# Altium PCB RFID_withESP32_PCB.PcbDoc (part 2 of 2)
Units mm, origin at the board's own origin, x right, y up, seen from the top; angles counter-clockwise.
Board outline 186.82 x 50.8 mm, 2 copper layers (Top Layer, Bottom Layer), stack 0.57 mm thick; 77 components, 38 nets, 231 pads, 164 vias.
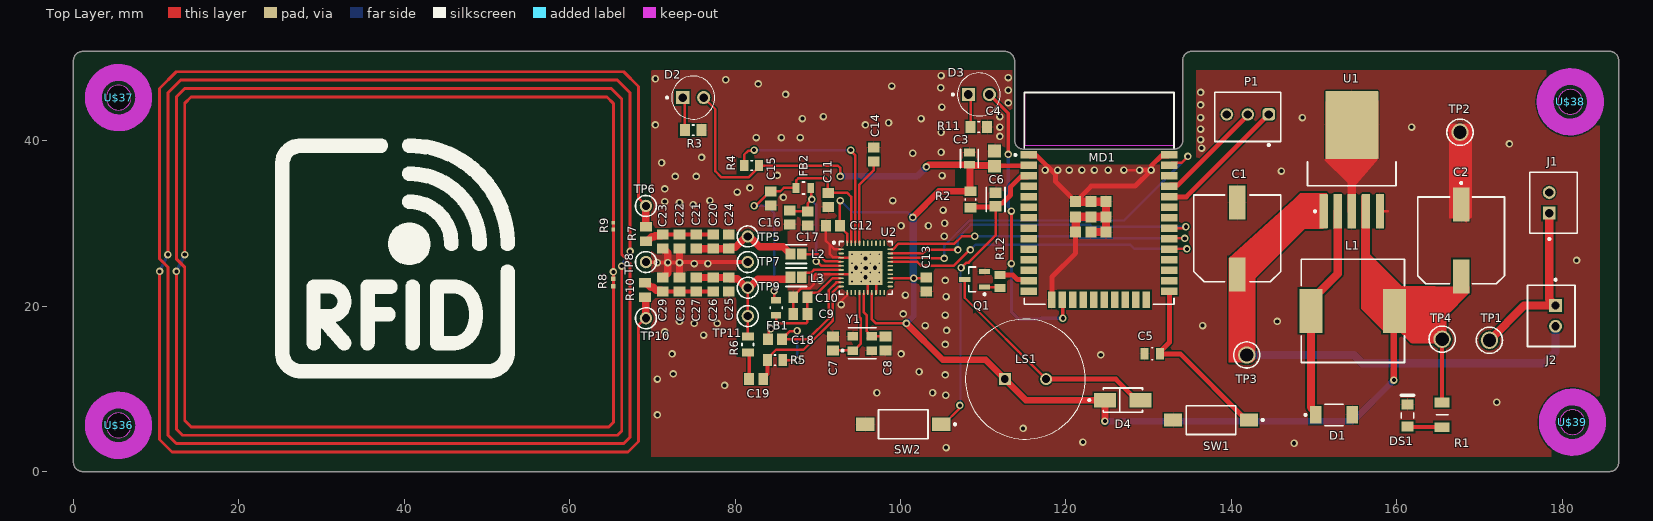
[diagram p0: Top Layer view]

## Via types
v1: diameter 0.907/0.907 (per signal layer), hole 0.5, Top Layer to Bottom Layer, 148 vias
v2: diameter 0.5, hole 0.2, Top Layer to Bottom Layer, 16 vias

## Nets (pads, with @x,y where several pads share a name; then routed paths per layer and width w, separated by ;. In a path a pad name is that pad's centre, name@x,y a point inside that pad or via, vN(x,y) a via of type N, cw(c..) or ccw(c..) an arc to the next point about the centre after c; other vN are vias at no path point) (continued)
NetC14_2: (continued)
  Top Layer w0.3: U2.37@95.04,27.695 95.03,27.705 95.03,34.705 96.774,36.449 C14.2
NetC19_2: C19.2 R6.2 | length 3.3
  Top Layer w0.45: R6.2 81.7,14.23 C19.2
NetC20_1: C20.1 C21.1 C24.2 L2.2 TP5.1 | length 12.9
  Top Layer w0.9: C21.1 C20.1 C24.2 79.39,27.109 80.051,27.109 81.372,28.43 TP5.1 81.696,28.43 82.948,27.178 85.811,27.178 86.472,26.517 86.573,26.517 86.7,26.39 L2.2
NetC20_2: C20.2 C21.2 C22.2 C23.2 R7.1 | length 8.5
  Top Layer w0.45: C23.2 C22.2 C21.2 C20.2
  Top Layer w0.9: R7.1 69.369,27.831 69.904,28.366 70.209,28.366 70.352,28.509 71.101,28.509 C23.2
NetC25_1: C25.1 C26.2 C27.2 L3.2 R6.1 TP9.1 TP11.1 | length 18.4
  Top Layer w0.3: R6.1 TP11.1 TP9.1
  Top Layer w0.9: C27.2 C26.2 C25.1 79.39,23.31 80.286,23.31 81.372,22.224 TP9.1 81.696,22.224 82.713,23.241 86.446,23.241 86.472,23.267 86.573,23.267 86.7,23.394 L3.2
NetC26_1: C26.1 C27.1 C28.1 C29.1 R10.2 | length 8.7
  Top Layer w0.45: C29.1 C28.1 C27.1 C26.1
  Top Layer w0.9: R10.2 69.246,22.842 69.781,22.307 70.086,22.307 70.483,21.91 71.101,21.91 C29.1
NetD1_2: D1.2 L1.1 U1.2 | length 26.2
  Top Layer w1: D1.2 150.2,7.208 149.636,7.772 L1.1 149.636,20.681 152.859,23.904 U1.2
NetD2_1: D2.1 R3.1 | length 4
  Top Layer w0.3: D2.1 73.93,44.942 R3.1
NetD3_1: D3.1 R11.1 | length 4.1
  Top Layer w0.3: D3.1 108.474,45.323 R11.1
  Top Layer w0.6: R11.1 R11.1@108.512,41.694
NetD3_2: D3.2 MD1.16 | length 36.3
  Top Layer w0.4: D3.2 113.03,43.307 v1(113.03,38.354) ; v1(113.411,25.146) v1(113.411,31.496) ; MD1.16 119.598,20.745 119.598,18.578 v1(119.634,18.542)
  Bottom Layer w0.4: v1(113.03,38.354) 113.03,31.985 113.411,31.604 v1(113.411,31.496) ; v1(113.411,25.146) 113.411,19.304 114.3,18.415 116.849,18.415 116.976,18.542 v1(119.634,18.542)
NetD4_2: D4.2 LS1.2 Q1.3 | length 28.6
  Top Layer w0.3: Q1.3 107.766,21.012 LS1.2
  Top Layer w0.6: LS1.2 126.033,11.176 128.573,8.636 D4.2
NetDS1_1: DS1.1 R1.1 | length 4.2
  Top Layer w0.5: DS1.1@161.325,5.393 R1.1@165.446,5.393
  Top Layer w1: DS1.1 DS1.1@161.325,5.393 ; R1.1@165.446,5.393 R1.1
NetL2_1: L2.1 U2.4 | length 5
  Top Layer w0.3: L2.1 90.043,26.289 90.932,25.4 92.44,25.4 92.47,25.37 U2.4@92.715,25.37
NetL3_1: L3.1 U2.6 | length 5.1
  Top Layer w0.3: L3.1 88.052,23.596 88.479,24.023 89.174,24.023 89.535,24.384 92.308,24.384 ; 92.308,24.369 92.44,24.369 92.44,24.384 92.508,24.384 92.512,24.38 92.705,24.38 U2.6@92.715,24.37
NetMD1_13: MD1.13 R12.1 | length 3.8
  Top Layer w0.6: R12.1 113.589,23.762 114.15,23.201 115.356,23.201 MD1.13
NetMD1_29: MD1.29 U2.27 | length 39.4
  Top Layer w0.3: U2.27@98.865,25.37 102.011,25.37 102.491,24.89 106.445,24.89 108.352,26.797 v1(108.458,26.797) ; MD1.29 132.569,26.924 v1(134.62,26.924)
  Bottom Layer w0.3: v1(108.458,26.797) 109.093,27.432 127.762,27.432 128.27,26.924 v1(134.62,26.924)
NetMD1_30: MD1.30 U2.30 | length 38.1
  Top Layer w0.3: U2.30@98.865,26.87 99.09,26.87 99.779,27.559 106.522,27.559 107.411,28.448 v1(108.966,28.448) ; MD1.30 132.569,28.194 v1(134.366,28.194)
  Bottom Layer w0.3: v1(108.966,28.448) 121.506,28.448 121.76,28.194 v1(134.366,28.194)
NetMD1_31: MD1.31 U2.29 | length 40.1
  Top Layer w0.3: U2.29@98.865,26.37 102.692,26.37 103.119,26.797 v1(106.934,26.797) ; MD1.31 134.168,29.401 134.358,29.591 v1(134.493,29.591)
  Bottom Layer w0.3: v1(106.934,26.797) 106.934,28.263 108.494,29.823 122.917,29.823 123.149,29.591 v1(134.493,29.591)
NetMD1_37: MD1.37 U2.28 | length 44.6
  Top Layer w0.3: U2.28@98.865,25.87 103.384,25.87 103.473,25.781 v1(105.283,25.781) ; MD1.37 132.806,37.321 133.968,37.321 v1(134.747,38.1)
  Bottom Layer w0.3: v1(105.283,25.781) 105.283,27.305 108.331,30.353 127,30.353 v1(134.747,38.1)
NetQ1_1: Q1.1 R12.2 | length 1.9
  Top Layer w0.3: Q1.1 R12.2@111.735,22.291 ; R12.2@111.814,22.212 R12.2
  Top Layer w0.6: R12.2@111.735,22.291 R12.2@111.814,22.212
NetR4_1: R4.1 U2.38 | length 25.8
  Top Layer w0.3: R4.1 81.1,38.301 81.565,38.766 82.2,38.766 v1(82.296,38.862) ; v1(93.98,38.862) 93.98,38.78 94.54,38.22 U2.38@94.54,27.695
  Bottom Layer w0.3: v1(82.296,38.862) v1(93.98,38.862)
NetR7_2: R7.2 R8.1 TP6.1 | length 383.5
  Top Layer w0.356: 65.278,23.299 65.278,22.41 65.278,5.917 64.77,5.409 14.224,5.409 13.462,6.171 13.462,24.713 12.446,25.729 12.446,45.287 13.462,46.303 65.024,46.303 66.294,45.033 66.294,26.237 67.31,25.221 67.31,4.139 66.548,3.377 12.446,3.377 11.43,4.393 11.43,24.713 10.414,25.729 10.414,46.303 12.446,48.335 66.548,48.335 68.334,46.549 68.334,33.077 TP6.1@69.223,32.188
  Top Layer w0.406: R7.2@69.219,29.731 69.223,29.735 TP6.1@69.223,32.188
  Top Layer w0.9: R7.2 TP6.1@69.219,32.109
NetR9_2: R9.2 R10.1 TP10.1 | length 381.7
  Top Layer w0.3: R10.1 R10.1@69.223,20.965
  Top Layer w0.356: v1(10.414,24.205) 10.414,3.885 11.938,2.361 67.056,2.361 68.334,3.639 68.334,17.727 TP10.1@69.223,18.616 ; v1(11.43,26.237) 11.43,45.795 12.954,47.319 65.786,47.319 67.31,45.795 v1(67.31,26.618) ; v1(12.446,24.205) 12.446,5.155 13.208,4.393 65.786,4.393 66.294,4.901 v1(66.294,24.84) ; v1(13.462,26.237) 13.462,44.525 14.224,45.287 64.516,45.287 65.278,44.525 R9.2@65.278,29.991 ; 65.278,29.293 65.278,29.928 R9.2@65.278,29.972
  Top Layer w0.406: R10.1 69.096,18.743 TP10.1@69.223,18.616
  Top Layer w0.9: TP10.1 R10.1@69.223,20.965
  Bottom Layer w0.406: v1(10.414,24.205) v1(11.43,26.237) ; v1(12.446,24.205) v1(13.462,26.237) ; v1(66.294,24.84) v1(67.31,26.618)
OSCIN: C7.2 U2.14 Y1.1 | length 10
  Top Layer w0.3: C7.2 94.206,14.64 Y1.1 94.352,14.619 95.217,15.484 95.217,18.498 95.04,18.675 U2.14
OSCOUT: C8.2 U2.15 Y1.3 | length 7.4
  Top Layer w0.3: U2.15@95.54,21.47 95.54,19.287 95.9,18.927 95.9,16.996 96.027,16.869 96.027,16.744 96.402,16.369 Y1.3 98.158,16.369 C8.2 ; Y1.3@96.012,16.09 Y1.3@96.112,16.09
RX: C19.1 R5.1 U2.10 | length 17.1
  Top Layer w0.3: R5.1 83.907,13.674 84.965,14.732 88.265,14.732 91.821,18.288 91.821,21.701 92.49,22.37 U2.10@92.715,22.37
  Top Layer w0.45: C19.1 83.4,11.292 83.907,11.799 R5.1
RXD0: MD1.34 P1.1 | length 16.1
  Top Layer w0.6: MD1.34 134.557,33.211 P1.1
TVDD: C16.2 C17.2 FB2.2 U2.5 | length 16.2
  Top Layer w0.3: C16.2 86.745,31.457 C17.2 88.777,32.389 v1(89.281,32.893) 89.223,32.951 89.223,34.232 FB2.2 ; v1(89.789,25.4) 89.924,25.4 90.45,24.874 92.711,24.874 U2.5@92.715,24.87
  Bottom Layer w0.3: v1(89.281,32.893) 89.281,32.758 89.789,32.25 v1(89.789,25.4)
TXD0: MD1.35 P1.2 | length 13.1
  Top Layer w0.6: MD1.35 132.656,34.631 133.529,34.631 141.986,43.088 P1.2
V_IN: J1.1 J2.1 TP1.1 | length 21.2
  Top Layer w1: TP1.1 175.387,20.066 J2.1 178.435,20.828 J1.1
V_SEC_IN: C1.2 J2.2 TP3.1 U1.1 | length 65.9
  Top Layer w1: TP3.1 141.859,14.395 140.716,15.538 C1.2 140.716,24.894 147.291,31.469 U1.1
  Bottom Layer w1: TP3.1 154.813,14.097 155.829,13.081 177.8,13.081 179.197,14.478 J2.2
VCC: C11.1 C15.2 FB1.1 FB2.1 U2.39 | length 34.3
  Top Layer w0.3: v1(82.296,32.131) 82.392,32.227 82.589,32.227 84.232,33.87 C15.2 85.461,33.87 85.881,34.29 FB2.1 87.376,34.301 87.376,35.179 87.63,35.433 90.932,35.433 91.186,35.179 91.186,33.743 C11.1 93.567,33.687 94.04,33.214 U2.39@94.04,27.695 ; v1(84.709,21.844) 84.709,20.962 84.959,20.712 FB1.1
  Bottom Layer w0.3: v1(82.296,32.131) 83.82,32.131 84.709,31.242 v1(84.709,21.844)
VMID: C18.2 R5.2 U2.9 | length 19.5
  Top Layer w0.3: R5.2 85.769,13.462 v1(87.503,13.462) ; v1(87.503,17.018) 87.462,16.977 86.653,16.977 86.232,16.556 86.132,16.556 85.682,16.106 C18.2 88.828,16.006 91.318,18.496 91.318,21.939 92.252,22.873 92.44,22.873 92.443,22.87 U2.9@92.715,22.87
  Bottom Layer w0.3: v1(87.503,13.462) v1(87.503,17.018)
pads on no net: MD1.4 MD1.5 MD1.6 MD1.7 MD1.8 MD1.9 MD1.10 MD1.11 MD1.12 MD1.14 MD1.17 MD1.18 MD1.19 MD1.20 MD1.21 MD1.22 MD1.23 MD1.24 MD1.26 MD1.27 MD1.28 MD1.32 MD1.33 MD1.36 U2.2 U2.12 U2.13 U2.19 U2.20 U2.21 U2.22 U2.24 U2.25 U2.26 U2.31 U2.32 U2.33 U2.34 U2.35 U2.36

## Polygon pours and split planes (outlines as drawn)
GND on Top Layer "GND_L01_P003" (solid, remove dead copper, pour order 3): 80.137,48.514 80.137,29.083 86.36,29.083 86.36,13.843 80.137,13.843 80.137,1.778 106.553,1.778 106.553,48.514
GND on Top Layer "GND_L01_P008" (solid, remove dead copper, pour order 8): 108.712,48.514 108.712,1.778 178.689,1.778 178.689,8.763 184.531,8.763 184.531,41.783 178.054,41.783 178.054,48.514 135.763,48.514 135.763,37.084 113.538,37.084 113.538,48.514
GND on Top Layer "GND_L01_P001" (solid, remove dead copper, pour order 1): 69.723,48.514 69.85,48.387 69.85,1.778 80.137,1.778 80.137,48.514
GND on Top Layer "GND_L01_P005" (solid, remove dead copper, pour order 5): 105.537,48.514 108.712,48.514 108.712,1.778 105.664,1.778 105.537,1.905
GND on Bottom Layer "GND_L02_P007" (solid, remove dead copper, pour order 7): 9.144,49.532 9.144,1.27 178.562,1.27 178.562,8.89 184.277,8.89 184.277,41.402 178.054,41.402 177.927,41.529 177.927,49.53 135.89,49.53 135.89,36.83 113.538,36.83 113.538,49.657

## Keep-outs
Bottom Layer:
  region: 14.732,43.763 15.24,44.271 63.5,44.271 64.008,43.763 64.008,7.187 63.5,6.425 15.24,6.425 14.732,6.933
  region: 9.144,22.173 9.144,23.443 14.224,23.443 14.224,22.173
  region: 9.144,26.999 9.144,28.269 14.224,28.269 14.224,26.999

## Other copper
Top Layer:
  region net FB3: 161.163,21.971 161.163,17.272 162.306,18.415 164.846,18.415
  region net FB3: 160.528,22.479 164.465,18.542 162.433,18.542 161.163,17.272 162.052,16.383 165.989,16.383 165.989,18.796 168.783,21.59 168.783,22.352
  region net GND: 166.37,42.037 169.037,42.037 169.037,30.734 168.402,30.099 167.894,30.607 166.37,30.607 166.37,41.021 165.989,41.402
  region net GND: 154.051,33.528 154.051,34.925 151.257,37.719 151.384,37.846 151.384,44.704 157.607,44.704 157.734,44.831 157.734,37.846
  region net FB3: 155.702,33.401 155.702,19.685 158.496,16.891 160.909,16.891 160.909,22.098 156.718,26.289 156.718,31.877
  region net V_SEC_IN: 148.463,29.464 148.59,29.337 151.13,29.337 151.13,30.353 150.749,30.734
  region net V_SEC_IN: 139.7,21.971 139.7,13.208 142.494,13.208 142.875,13.589 142.875,23.622 142.494,24.003
  region net V_SEC_IN: 139.7,25.781 139.7,21.971 141.478,21.971 149.098,29.591 151.384,29.591 151.511,29.464 151.511,33.655 148.336,33.655 147.574,32.893

## Silkscreen, mask and mechanical layers (free items; w line width, h text height)
Top Overlay:
  drawing of 9 lines, arcs and shapes, not listed
Mechanical 1:
  lines w0.254: 0,1.143 ccw(c1.143,1.143) 1.143,0 185.801,0 ccw(c185.737,1.079) 186.817,1.143 186.817,49.657 ccw(c185.737,49.721) 185.801,50.8 136.652,50.8 135.382,50.8 135.128,50.8 ccw(c135.191,49.721) 134.112,49.657 134.112,40.005 cw(c133.096,40.005) 133.096,38.989 114.935,38.989 cw(c114.871,40.069) 113.792,40.005 113.792,49.657 ccw(c112.585,49.593) 112.522,50.8 1.143,50.8 ccw(c1.143,49.657) 0,49.657 0,1.143

## Text inside footprints (layer, text, board x,y; h text height)
U$36: Mechanical 19 "3,0" at 4.191,1.778 h1.08
U$37: Mechanical 19 "3,0" at 4.191,41.402 h1.08
U$38: Mechanical 19 "3,0" at 179.705,40.894 h1.08
U$39: Mechanical 19 "3,0" at 179.959,2.159 h1.08